# Altium PCB mag_pos_breakout.PcbDoc
Units mm, origin at the board's own origin, x right, y up, seen from the top; angles counter-clockwise.
Board outline 14 x 13.92 mm, 4 copper layers (Top Layer, Layer 1, Layer 2, Bottom Layer), stack 0.961 mm thick; 3 components, 28 nets, 16 pads, 0 vias.
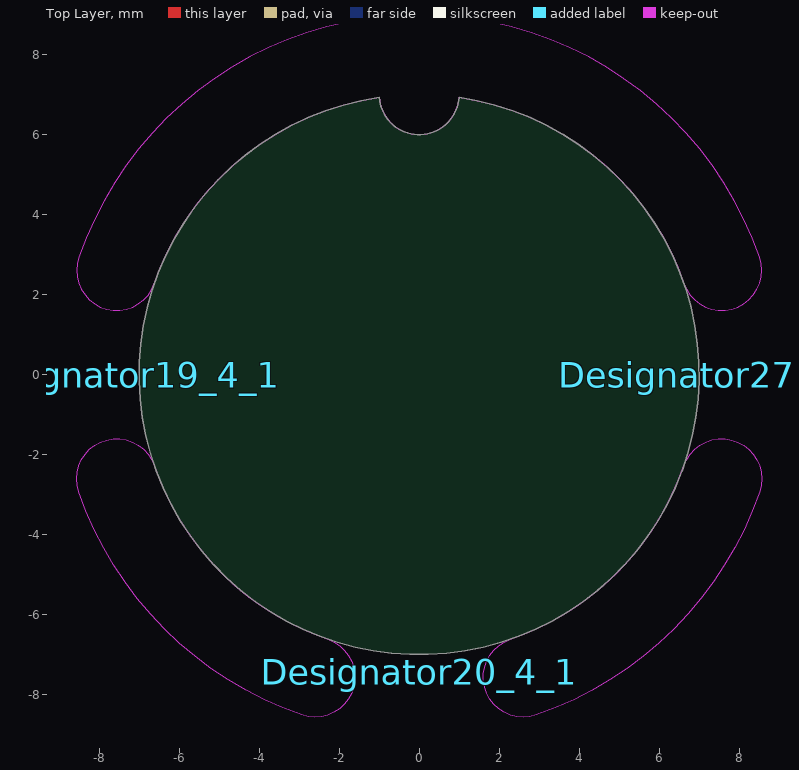
[diagram p0: Top Layer view]
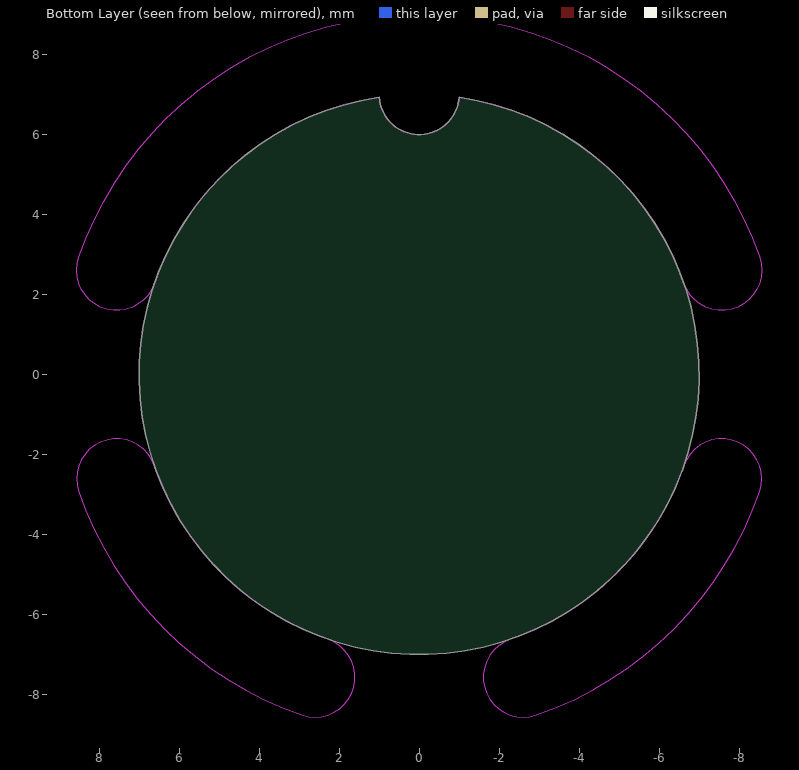
[diagram p1: Bottom Layer view, seen from below]

## Layer stack, top to bottom
Top Solder: solder mask 0.0102, Solder Resist, Dk 3.5
Top Layer: signal copper 0.0356
Dielectric 2: prepreg 0.11, PP-006, Dk 4.1
Layer 1: signal copper 0.035
Dielectric 1: dielectric 0.6, FR-4, Dk 4.8
Layer 2: signal copper 0.035
Dielectric 3: prepreg 0.11, PP-006, Dk 4.1
Bottom Layer: signal copper 0.0356
Bottom Solder: solder mask 0.0102, Solder Resist, Dk 3.5

## Board outline
-0.997,6.929 ccw(c0,0) 0.997,6.929 cw(c0,7)
cut-out: 2.93,-8.51 cw(c2.605,-7.564) 2.279,-6.619 2.276,-6.62 ccw(c0,0) 6.62,-2.276 6.619,-2.279 cw(c7.564,-2.605) 8.51,-2.93 cw(c0,0)
cut-out: -2.93,-8.51 cw(c0,0) -8.51,-2.93 cw(c-7.564,-2.605) -6.619,-2.279 -6.62,-2.276 ccw(c0,0) -2.276,-6.62 -2.279,-6.619 cw(c-2.605,-7.564)
cut-out: -8.51,2.93 ccw(c-7.564,2.605) -6.619,2.279 -6.62,2.276 cw(c0,0) -0.999,6.928 -0.997,6.928 ccw(c0,7) 0.997,6.928 1,6.928 cw(c0,0) 6.62,2.276 6.619,2.279 ccw(c7.564,2.605) 8.51,2.93 ccw(c0,0)

## Design rules (kind name [scope] priority, off if disabled: settings)
Clearance [All] p1: gap=0.2 ignorepadtopadclearanceinfootprint=FALSE except(0: Arc-Hole Track-Hole SMDPad-Hole THPad-Hole Via-Hole Fill-Hole Poly-Hole Region-Hole Text-Hole)
ComponentClearance [All] p1: gap=0.2 collisioncheckmode=3 verticalgap=0.2 showdistances=FALSE
HoleSize [All] p1: absolutevalues=TRUE maxlimit=3.2 minlimit=0.3 maxpercent=80.000 minpercent=20.000
HoleToHoleClearance [All] p1: gap=0.3 allowstackedmicrovias=TRUE
MinimumAnnularRing [All] p1: minimumring=0.15
MinimumSolderMaskSliver [All] p1: minsoldermaskwidth=0.1
PolygonConnect [All] p1: thpad.connectstyle=Relief thpad.reliefconductorwidth=0.3 thpad.reliefentries=4 thpad.polygonreliefangle="90 Angle" thpad.airgapwidth=0.3 smdpad.connectstyle=Relief smdpad.reliefconductorwidth=0.25 smdpad.reliefentries=4 smdpad.polygonreliefangle="90 Angle" smdpad.airgapwidth=0.25 via.connectstyle=Direct via.reliefconductorwidth=0.254 via.reliefentries=4 via.polygonreliefangle="90 Angle" via.airgapwidth=0.254
RoutingVias [All] p1: holewidth=0.35 width=0.7 viastyle="Through Hole" minholewidth=0.3 minwidth=0.65 maxholewidth=0.5 maxwidth=3
SilkToSilkClearance [All] p1: silktosilkclearance=0.1
SilkToSolderMaskClearance [IsPad] p1: minsilkscreentomaskgap=0.15 clearancetoexposedcopper=TRUE
SolderMaskExpansion SolderMaskExpansion_Via [IsVia] p1: expansion=0.102 istentingtop=TRUE
SolderMaskExpansion [All] p2: expansion=0.05 istentingtop=FALSE
Width [All] p1: maxlimit=0.5 minlimit=0.2 preferedwidth=0.2 minimp=50.000000 maximp=50.000000 favimp=50.000000
24 further rules are at their usual default settings.

## Components (designator, comment, footprint, x,y, rotation, side; value= is the part's Value field where it differs from the comment)
Designator19_4_1 "Comment" BREAKOUT_2_3_7R_NB 0,0 r90 top
Designator20_4_1 "Comment" BREAKOUT_2_3_7R_NB 0,0 r180 top
Designator27_4_1 "Comment" BREAKOUT_2_3_7R_NB 0,0 r270 top

## Footprints (in the part's own frame and the unit in brackets; to place one, negate y for a bottom-side part, rotate by r counter-clockwise, add the part's x,y. Pads: shape width x height; smd on the part's side, far side on the other; paste and mask are expansions set on the pad)
BREAKOUT_2_3_7R_NB [mm] "Breakout, 2mm gap, 3mm connection, straight, No border"
  round 0 hole 2 unplated: 0(-2.605,7.564) 0(2.605,7.564)
  round 0 hole 0.75 unplated: 1(-1.026,7.303) 2(0,7.375) 3(1.026,7.303)

## Free pads (board coordinates)
  round 0 hole 2: 0(0,7)

## Nets (pads, with @x,y where several pads share a name; then routed paths per layer and width w, separated by ;. In a path a pad name is that pad's centre, name@x,y a point inside that pad or via, vN(x,y) a via of type N, cw(c..) or ccw(c..) an arc to the next point about the centre after c; other vN are vias at no path point)
3V3_FB: 
3V3_Out: 
3V3_Ref: 
+3V3: 
+5V: 
A: 
A_FB: 
A_uC: 
B: 
B_FB: 
B_uC: 
CS: 
GND: 
INT: 
INTTRIG: 
LED_Blue: 
LED_Blue_R: 
LED_Green: 
LED_Green_R: 
LED_Red: 
LED_Red_R: 
MISO: 
MOSI: 
RX: 
SBWTCK: 
SBWTDIO: 
SCLK: 
TX: 
pads on no net: Designator19_4_1.0 Designator19_4_1.1 Designator19_4_1.2 Designator19_4_1.3 Designator20_4_1.0 Designator20_4_1.1 Designator20_4_1.2 Designator20_4_1.3 Designator27_4_1.0 Designator27_4_1.1 Designator27_4_1.2 Designator27_4_1.3

## Silkscreen, mask and mechanical layers (free items; w line width, h text height)
Top Solder:
  region: 2.93,-8.51 cw(c2.605,-7.564) 2.279,-6.619 2.276,-6.62 ccw(c0,0) 6.62,-2.276 6.619,-2.279 cw(c7.564,-2.605) 8.51,-2.93 cw(c0,0)
  region: -2.93,-8.51 cw(c0,0) -8.51,-2.93 cw(c-7.564,-2.605) -6.619,-2.279 -6.62,-2.276 ccw(c0,0) -2.276,-6.62 -2.279,-6.619 cw(c-2.605,-7.564)
  region: -8.51,2.93 ccw(c-7.564,2.605) -6.619,2.279 -6.62,2.276 cw(c0,0) -0.999,6.928 -0.997,6.928 ccw(c0,7) 0.997,6.928 0.997,6.929 cw(c0,0) 6.62,2.276 6.619,2.279 ccw(c7.564,2.605) 8.51,2.93 ccw(c0,0)
Bottom Solder:
  region: -8.51,2.93 ccw(c-7.564,2.605) -6.619,2.279 -6.62,2.276 cw(c0,0) -0.999,6.928 -0.997,6.928 ccw(c0,7) 0.997,6.928 0.997,6.929 cw(c0,0) 6.62,2.276 6.619,2.279 ccw(c7.564,2.605) 8.51,2.93 ccw(c0,0)
  region: -2.93,-8.51 cw(c0,0) -8.51,-2.93 cw(c-7.564,-2.605) -6.619,-2.279 -6.62,-2.276 ccw(c0,0) -2.276,-6.62 -2.279,-6.619 cw(c-2.605,-7.564)
  region: 2.93,-8.51 cw(c2.605,-7.564) 2.279,-6.619 2.276,-6.62 ccw(c0,0) 6.62,-2.276 6.619,-2.279 cw(c7.564,-2.605) 8.51,-2.93 cw(c0,0)
Board:
  the board outline again, w0.1
Mechanical 16:
  lines w0.001: -8.51,-2.93 ccw(c0,0) -2.93,-8.51 ; -8.51,2.93 cw(c0,0) 8.51,2.93 ; -6.62,-2.276 ccw(c0,0) -2.276,-6.62 ; -6.62,2.276 cw(c0,0) -0.999,6.928 ; -0.997,6.928 ccw(c0,7) 0.997,6.928 cw(c0,0) 6.62,2.276 ; 2.276,-6.62 ccw(c0,0) 6.62,-2.276 ; 2.93,-8.51 ccw(c0,0) 8.51,-2.93